# Altium PCB PCB robot V3.2.PCBDOC (part 3 of 3)
Units mil, origin at the board's own origin, x right, y up, seen from the top; angles counter-clockwise.
Board outline 11800 x 7870 mil, 2 copper layers (Top Layer, Bottom Layer); 128 components, 117 nets, 529 pads, 283 vias.
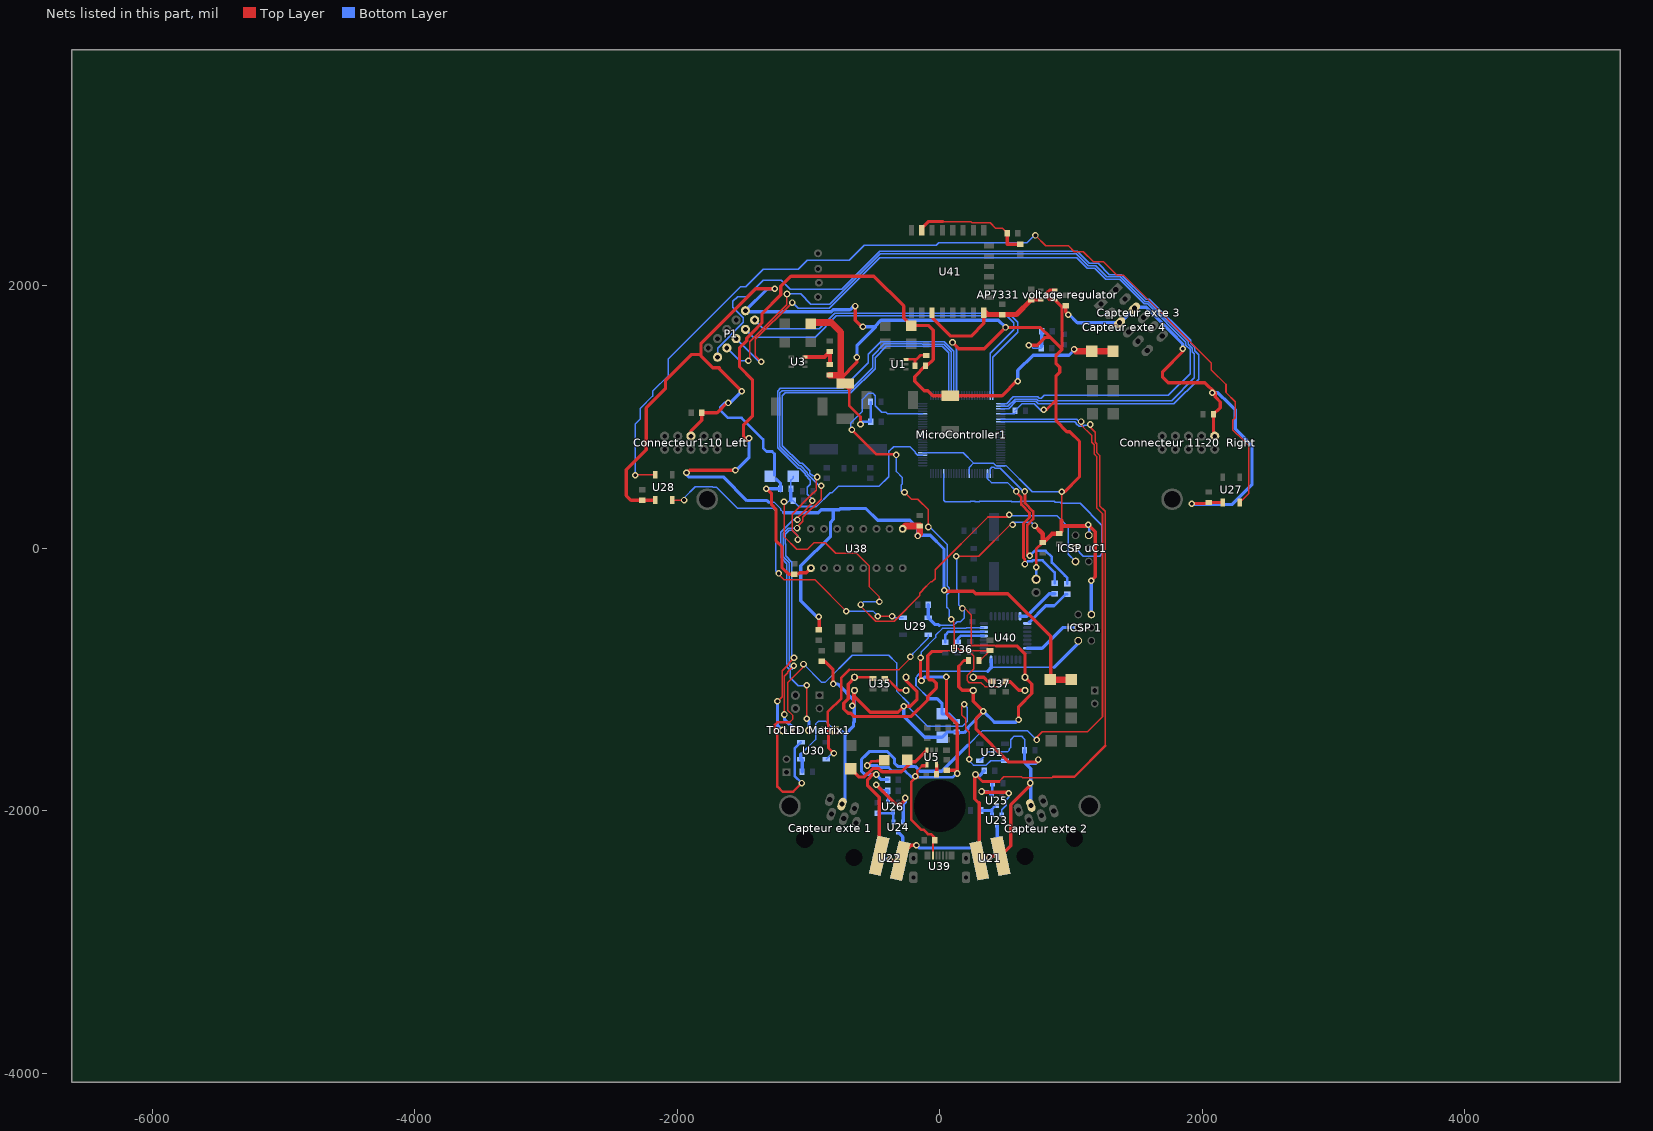
[diagram p3: the nets of this part, all layers, seen from the top]

## Via types
v1: diameter 50, hole 28, Top Layer to Bottom Layer, 283 vias

## Nets (pads, with @x,y where several pads share a name; then routed paths per layer and width w, separated by ;. In a path a pad name is that pad's centre, name@x,y a point inside that pad or via, vN(x,y) a via of type N, cw(c..) or ccw(c..) an arc to the next point about the centre after c; other vN are vias at no path point) (continued)
NetMicroController1_46: MicroController1.46 U36.1 | length 2921.3
  Top Layer w12: v1(-268.27,427.58) -214.19,373.5 -166.4,373.5 -85.94,293.05 v1(-85.94,162.64) ; v1(87.99,-541.71) 108.66,-562.38 108.66,-592.4 109.45,-593.19 U36.1@109.45,-740.55
  Top Layer w19.68: v1(-668.87,902.46) -482.54,716.12 v1@-352.7,716.12
  Bottom Layer w12: v1@-677.72,903.98 -677.72,955.61 -588.86,1044.47 -588.86,1134.72 -540.45,1183.13 -510.22,1183.13 -490.22,1163.13 -490.22,1086.34 -441.78,1037.91 -408.92,1037.91 -395.49,1024.48 MicroController1.46@-129.71,1024.48 ; v1(-329.9,711.67) -329.9,585.07 -286.82,541.98 -286.82,487.56 -291.99,482.39 -291.99,433.31 -286.26,427.58 v1(-268.27,427.58) ; v1@-80.14,166.12 58.85,27.13 58.85,-289.87 72.04,-303.06 72.04,-334.94 53.51,-353.47 53.51,-448.66 71.77,-466.92 v1@71.77,-525.49
NetMicroController1_58: "To LED Matrix1.5" MicroController1.58 | length 4906.3
  Top Layer w10: v1@-1238.01,-1165.47 v1(-1236.46,-1165.47) -1233.35,-1165.47 -1200.75,-1132.87 -1200.75,-932.81 -1150.83,-882.89 -1150.83,-875.39 v1(-1110.16,-834.72) ; -1200.75,-1384.09 -1196.69,-1388.15 ; v1(-1081.02,66.61) -1081.02,94.02 -1124.67,137.66 -1124.67,260.61 -985.79,399.49 -985.55,399.49 -941.99,443.05 -941.99,533.9 v1(-932.32,543.56)
  Bottom Layer w10: v1@-1126.83,-838.19 -1126.83,-104.63 -1174.17,-57.29 -1174.17,32.42 -1175.66,33.91 -1175.66,108.16 -1146.81,137.01 -1122.63,137.01 -1081.02,95.4 v1(-1081.02,66.61) ; v1@-933.29,531.97 -952.62,551.3 -968.29,551.3 -990.79,573.8 -990.79,590.55 -1047.12,646.88 -1063.87,646.88 -1199.61,782.62 -1199.61,1162.6 -1178.17,1184.04 -678.91,1184.04 -492.99,1369.95 -492.99,1452.72 -406.18,1539.53 20.2,1539.53 67.34,1492.38 69.1,1492.38 MicroController1.58@69.1,1164.24
  Bottom Layer w25: v1(-1236.46,-1165.47) -1236.46,-1348.39 -1196.69,-1388.15
NetMicroController1_59: "To LED Matrix1.4" MicroController1.59 | length 4858.7
  Top Layer w10: v1(-1183.15,-1266.67) -1183.15,-973.13 -1158.07,-948.05 -1158.07,-939.54 v1(-1113.27,-894.73) v1@-1113.27,-892.98 ; v1@-1113.31,-894.73 v1@-1113.31,-892.98 ; -1072.28,175.28 -1042.62,204.93 -1042.62,235.24 -903.41,374.45 v1(-903.41,477.54)
  Bottom Layer w10: -1120.89,-920.37 -1121.96,-920.37 -1143.92,-898.42 -1143.92,-876.35 -1147.64,-872.63 -1147.64,-108.55 -1191.65,-64.53 -1191.65,25.18 -1193.14,26.67 -1193.14,115.4 -1154.06,154.49 v1(-1087.11,154.49) v1@-1092.07,149.53 ; v1@-902.83,467.85 -909.73,467.85 -1008.39,566.51 -1008.39,577.11 -1060.56,629.29 -1071.16,629.29 -1217.2,775.33 -1217.2,1184.37 -1199.94,1201.63 -686.2,1201.63 -510.59,1377.24 -510.59,1468.96 -422.3,1557.24 -131.96,1557.24 -131.84,1557.13 29.25,1557.13 88.79,1497.58 MicroController1.59@88.79,1164.24
  Bottom Layer w25: v1(-1183.15,-1266.67) -1183.15,-1301.69 -1096.69,-1388.15
NetMicroController1_60: "To LED Matrix1.3" MicroController1.60 | length 4901.8
  Top Layer w10: v1(-1083.96,216.71) -1083.96,232.01 -1052.97,262.99 -1052.97,263.56 -969.67,346.87 -970.22,347.42 v1(-970.22,361.89) ; v1(-1014.19,-1043.03) -1014.19,-1283.8 v1@-1000.55,-1297.44
  Bottom Layer w10: v1(-1083.96,216.71) -1117.03,216.71 -1188.44,145.3 -1188.44,144.82 -1210.62,122.64 -1210.62,19.43 -1209.13,17.94 -1209.13,-71.77 -1165.12,-115.79 -1165.12,-879.87 -1161.4,-883.6 -1161.4,-905.66 -1138.37,-928.69 -1138.37,-984.72 -1077.03,-1046.06 v1@-1009.65,-1046.06 ; v1@-982.15,346.02 -972.2,355.96 -972.2,375.16 -1008.76,411.71 -1008.76,467.19 -987.24,488.7 -987.24,520.48 -1025.98,559.22 -1025.98,569.98 -1067.69,611.69 -1078.45,611.69 -1234.8,768.04 -1234.8,1198.61 -1214.19,1219.23 -737.32,1219.23 -543.9,1412.66 -543.9,1479.19 -448.37,1574.72 36.54,1574.72 108.47,1502.79 MicroController1.60@108.47,1164.24
  Bottom Layer w25: v1(-1014.19,-1299.72) -996.69,-1317.22 -996.69,-1388.15
NetMicroController1_74: MicroController1.74 P1.7 | length 2784.3
  Bottom Layer w10: P1.7@-1480.78,1668.82 -1422.45,1610.49 -950.12,1610.49 -789.94,1770.67 511.44,1770.67 562.56,1719.55 562.56,1665.12 384.06,1486.62 MicroController1.74@384.06,1164.24
NetMicroController1_75: MicroController1.75 P1.9 | length 2746.4
  Bottom Layer w10: P1.9@-1410.07,1739.54 -1345.69,1675.16 -918.62,1675.16 -801.22,1792.56 525.43,1792.56 594.13,1723.86 594.13,1646.16 403.75,1455.78 MicroController1.75@403.75,1164.24
NetMicroController1_76: MicroController1.76 P1.5 | length 6098.6
  Top Layer w10: v1(-1359.13,1422.7) -1404.96,1468.52 -1404.96,1592.06 -1124.41,1872.61 v1(-1124.41,1873.17)
  Bottom Layer w10: P1.5@-1551.49,1598.11 -1376.07,1422.7 v1(-1359.13,1422.7) ; v1(-1124.41,1873.17) -1121.69,1873.17 -1076.91,1828.39 -843.54,1828.39 -455.49,2216.44 1044.26,2216.44 1124.99,2135.71 1182.36,2135.71 1266.96,2051.1 1370.68,2051.1 1559.07,1862.72 1584.14,1862.72 1876.73,1570.13 1876.73,1548.3 1908.46,1516.57 1908.46,1330.39 1743.11,1165.04 795.3,1165.04 774.21,1143.95 758.71,1143.95 747.74,1154.92 560.91,1154.92 509.2,1103.22 MicroController1.76@464.77,1103.22
NetMicroController1_77: MicroController1.77 P1.3 | length 6242.6
  Top Layer w10: v1@-1457.66,1421.81 v1(-1457.66,1430) -1445.98,1441.67 -1445.98,1575.87 -1163.76,1858.09 v1(-1163.76,1938.29)
  Bottom Layer w10: P1.3@-1622.2,1527.4 -1524.8,1430 v1(-1457.66,1430) ; v1(-1163.76,1938.29) -1060.63,1938.29 -981.95,1859.61 -837.21,1859.61 -452.49,2244.33 1041.25,2244.33 1132.28,2153.31 1189.65,2153.31 1274.25,2068.7 1377.81,2068.7 1566.31,1880.2 1591.38,1880.2 1894.21,1577.37 1894.21,1555.54 1925.94,1523.81 1925.94,1498.14 1940.77,1483.32 1940.77,1298.66 1767.17,1125.06 752.88,1125.06 740.5,1137.44 574.04,1137.44 520.13,1083.53 MicroController1.77@464.77,1083.53
NetMicroController1_78: MicroController1.78 P1.1 | length 6493
  Bottom Layer w10: P1.1@-1669.8,1479.81 P1.1@-1692.91,1456.69 -1692.91,1526.4 -1495.41,1723.9 -1495.41,1757.56 -1575.87,1838.02 -1575.87,1881.5 -1539.74,1917.62 -1469.41,1917.62 -1344.51,2042.52 -1207.17,2042.52 -1139.72,1975.08 -746.63,1975.08 -458.04,2263.66 1046.81,2263.66 1139.57,2170.91 1207.72,2170.91 1292.32,2086.3 1384.93,2086.3 1573.55,1897.68 1598.63,1897.68 1911.69,1584.61 1911.69,1562.78 1943.43,1531.05 1943.43,1505.55 1972.48,1476.5 1972.48,1288.82 1784.84,1101.18 752.04,1101.18 733.26,1119.96 581.45,1119.96 525.34,1063.85 MicroController1.78@464.77,1063.85
NetMicroController1_82: MicroController1.82 R28.1 U22.gndReceiver | length 6187.3
  Top Layer w10: v1@721.83,-1455.81 726.2,-1460.18 v1(739.33,-1460.18) ; 1077.52,939.86 v1(1077.52,966.24)
  Top Layer w12: v1(739.33,-1460.18) 739.33,-1440.47 782.03,-1397.78 1125.94,-1397.78 1240.51,-1283.21 1240.51,263.66 1195.57,308.6 1195.57,700.51 1177.11,718.97 1177.11,789.53 1158.01,808.63 1158.01,859.37 1077.52,939.86
  Top Layer w25: v1@-480.86,-1722.68 -508.95,-1722.68 -549.49,-1763.22 -549.49,-1808.71 -461.31,-1896.89 U22.gndReceiver@-461.31,-2343.61
  Bottom Layer w10: MicroController1.82@464.77,985.11 1043.77,985.11 v1@1076.17,952.71 ; v1@720.96,-1460.18 v1(739.33,-1460.18)
  Bottom Layer w12: 215.33,-1500.59 327.09,-1388.84 667.99,-1388.84 v1(739.33,-1460.18)
  Bottom Layer w25: R28.1@-395.21,-1762.43 -444.77,-1762.43 v1(-483.59,-1723.6) -571.12,-1723.6 -595.98,-1698.74 -595.98,-1608.76 -564.67,-1577.44 -562.2,-1577.44 -535.85,-1551.09 -535.85,-1548.62 -535.71,-1548.48 -399.65,-1548.48 -344.33,-1603.8 -344.33,-1637.64 -319.57,-1662.4 -187.42,-1662.4 -150.27,-1699.55 16.38,-1699.55 215.33,-1500.59
NetMicroController1_83: MicroController1.83 R27.1 U21.gndReceiver | length 5037.8
  Top Layer w10: v1@1147.5,922.87 v1(1147.5,943.5)
  Top Layer w12: 452.77,-1776.89 488.74,-1740.93 575.23,-1740.93 575.61,-1741.31 623.76,-1741.31 632.37,-1749.92 673.7,-1749.92 673.89,-1749.73 705.83,-1749.73 706.03,-1749.92 856.22,-1749.92 865.22,-1740.93 ; v1@1147.5,922.87 1185.98,884.39 1185.98,808.32 1196.67,797.64 1196.67,729.56 1218.37,707.85 1218.37,324.9 1261.1,282.17 1261.1,-1506.1
  Top Layer w19.68: v1(272.83,-1723.58) 326.14,-1776.89 452.77,-1776.89 ; 865.22,-1740.93 1025.89,-1740.93 1260.71,-1506.1
  Top Layer w25: v1@268.23,-1728.19 268.23,-1909.68 268.98,-1910.43 268.98,-1910.59 295.79,-1937.4 ; U21.gndReceiver@301.81,-2379.39 301.81,-1937.86
  Bottom Layer w10: MicroController1.83@464.77,965.42 1028.01,965.42 1040.04,953.39 ; 1040.04,950.72 1061.99,928.76 1093.04,928.76 1101.54,937.26 1102.3,936.5 v1@1123.9,936.5
  Bottom Layer w25: v1@284.7,-1735.45 300.67,-1735.45 R27.1@340.47,-1695.65
NetR1_1: R1.1 R3.2 U1.3 | length 310.3
  Top Layer w20: U1.3@-257.81,1440.33 -178.29,1440.33 -148.27,1470.35 -102.64,1470.35 R3.2@-102.52,1470.24 -147.91,1470.24 -188.31,1429.84 R1.1@-188.31,1389.8
NetR5_1: R5.1 R6.2 U3.3 | length 302.7
  Top Layer w31.5: U3.3@-1025.33,1458.05 -876.83,1458.05 -836.95,1497.93 R5.1@-836.95,1400.18
NetR9_1: R9.1 U5.5 | length 71.9
  Top Layer w25: R9.1@-23.2,-1720.09 U5.5@-23.2,-1648.15
NetR29_2: R29.2 U23.1 U25.3 | length 153
  Bottom Layer w19.68: U23.1@398.59,-2031.48 398.59,-1988.49 418.13,-1968.96
  Bottom Layer w25: R29.2@314.88,-1998.01 397.25,-1998.01
NetR30_2: R30.2 U24.1 U26.3 | length 197.6
  Bottom Layer w19.68: R30.2@-472.09,-2019.98 -366.27,-2019.98 U26.3@-356.12,-2009.82 -353.43,-2012.51 U24.1@-353.43,-2086.13
NetR31_2: R31.2 U23.2 U25.1 | length 560.1
  Top Layer w25: v1@325.72,-1859.94 v1@526.87,-1859.94
  Bottom Layer w12: U23.2@473.4,-2031.48 473.4,-1991.76 506.5,-1958.66 506.5,-1916.93 526.87,-1896.56 v1(526.87,-1865.39)
  Bottom Layer w19.68: U25.1@401.76,-1870.23 R31.2@401.76,-1790.7
  Bottom Layer w25: v1(319.14,-1853.36) 368.87,-1853.36 U25.1@398.2,-1882.69
NetR32_2: R32.2 U24.2 U26.1 | length 693.5
  Top Layer w25: v1(-483.98,-1801.77) -337.54,-1948.21 -293.62,-1948.21 -261.78,-1916.37 v1(-261.78,-1902.91)
  Bottom Layer w19.68: v1@-478.49,-1805.44 v1@-471.17,-1805.44 ; U26.1@-393.52,-1931.08 R32.2@-393.52,-1851.44
  Bottom Layer w25: v1(-483.98,-1801.77) -437.3,-1848.45 R32.2@-396.52,-1848.45 ; U24.2@-278.63,-2086.13 -278.63,-1951.52 -261.78,-1934.67 v1(-261.78,-1902.91)
NetR33_2: R33.2 U35.4 U36.3 | length 1760.9
  Top Layer w12: 11.06,-786.77 17.91,-779.92 U36.3@109.45,-779.92
  Top Layer w20: U35.4@-649.61,-982.68 -518.43,-982.68 R33.2@-508.07,-993.03
  Top Layer w25: U35.4@-649.61,-982.68 -649.61,-987.44 -697.22,-1035.06 -697.22,-1145.93 -730.59,-1179.29 -730.59,-1224.61 -697.46,-1257.74 -677.5,-1257.74 -654.09,-1281.14 -217.01,-1281.14 -91.91,-1156.04 -91.91,-1131.26 -25.59,-1064.94 -25.59,-1027.62 -51.99,-1001.22 -78.86,-1001.22 -91.91,-988.17 -91.91,-818.35 -60.33,-786.77 11.06,-786.77
NetR34_2: R34.2 U35.2 | length 199.1
  Top Layer w20: R34.2@-417.66,-992.46 -412.62,-997.5 -397.05,-997.5 -311.87,-1082.68 U35.2@-255.91,-1082.68
NetR35_2: R35.2 U37.2 | length 161.7
  Top Layer w25: U37.2@255.91,-982.68 335.43,-982.68 365.87,-1013.11 R35.2@404.96,-1013.11
NetR36_2: R36.2 U36.5 U37.4 | length 756.6
  Top Layer w12: U36.5@223.62,-799.61 223.75,-799.48 238.63,-799.48 259,-819.84 259,-919.96 209.49,-969.47 209.49,-1007.07 226.22,-1023.8 314.76,-1023.8 344.55,-1053.58 462.81,-1053.58 R36.2@503.29,-1013.11
  Top Layer w25: R36.2@503.29,-1013.11 506.56,-1016.38 536.81,-1016.38 603.11,-1082.68 U37.4@649.61,-1082.68
NetR41_1: R41.1 U40.30 | length 358.9
  Bottom Layer w20: R41.1@43.3,-714.94 43.3,-659.67 67.35,-635.62 U40.30@336.92,-635.62
NetR42_1: R42.1 U40.8 | length 334.6
  Bottom Layer w25: U40.8@612.51,-517.51 663.6,-517.51 834.73,-346.37 R42.1@876.2,-346.37
NetR43_1: R43.1 U40.9 | length 377.9
  Bottom Layer w20: 870.08,-438.19 957.87,-350.4 R43.1@970.83,-350.4
  Bottom Layer w25: 680.39,-561.53 685.59,-561.53 808.93,-438.19 870.08,-438.19
NetR44_2: R44.2 U40.29 | length 233.4
  Bottom Layer w20: R44.2@138.88,-715.02 138.88,-688.59 160.36,-667.11 U40.29@336.92,-667.11
NetR51_2: R51.2 R52.1 U41.21 | length 903.7
  Top Layer w12: 25.28,2490.16 239.11,2490.16 248.96,2480.31 384.86,2480.31 425.45,2439.72 477.8,2439.72 R51.2@515.24,2402.29
  Top Layer w25: U41.21@-137.13,2430.73 -137.13,2439.41 -86.38,2490.16 25.28,2490.16 ; R51.2@515.24,2402.29 515.24,2317.55 514.62,2316.93 R52.1@614.21,2316.93
NetU21_gndEmitter: U21.gndEmitter U23.3 | length 227.6
  Bottom Layer w25: U21.gndEmitter@438.04,-2343.24 U23.3@438.04,-2115.65
NetU22_gndEmitter: U22.gndEmitter U24.3 | length 238
  Bottom Layer w25: U24.3@-316.03,-2164.87 -281.42,-2199.49 -281.42,-2362.03 U22.gndEmitter@-300.19,-2380.8
NetU27_dout: U27.dout U28.din | length 7278.4
  Top Layer w12: v1@-2317.26,563.58 -2314.31,560.63 U28.din@-2168.31,560.63 ; v1(729.53,2384.63) 807.7,2306.46 980.79,2306.46 1026.26,2260.98 1094.73,2260.98 1172.32,2183.39 1248.79,2183.39 1349.95,2082.22 1400.39,2082.22 2069.76,1412.85 2069.76,1408.74 2070.47,1408.03 2070.47,1359.92 2181.91,1248.48 2181.91,1188.33 2252.21,1118.03 2252.21,1003.22 2250.89,1001.9 2250.89,993.26 2233.41,975.77 2233.41,901.54 2268.19,866.75 2271.16,866.75 2353.88,784.03 2353.88,415.49 U27.dout@2287.4,349.02
  Bottom Layer w12: v1(-2319.88,557.07) -2319.88,947.83 -2282.11,985.61 -2282.11,1066.38 -2188.31,1160.18 -2188.31,1196.65 -2067.17,1317.8 -2067.17,1444.05 -1517.38,1993.84 -1478.39,1993.84 -1345.53,2126.69 -1078.5,2126.69 -1009.45,2195.75 -689.62,2195.75 -575,2310.37 -25.99,2310.37 -7.76,2328.6 665.69,2328.6 v1@713.9,2376.81
NetU28_dout: U28.dout U29.din | length 2503.4
  Top Layer w12: U28.dout@-2038.39,367.72 v1(-1948.17,367.72) ; v1(-1227.32,-191.42) -1227.32,-198.64 -1187.82,-238.15 -952.93,-238.15 v1@-705.59,-485.49 ; v1@-475.16,-511.28 -468.92,-517.52 v1(-363.05,-517.52)
  Bottom Layer w12: v1(-1948.17,367.72) -1948.17,384.29 -1862.29,470.17 -1731.82,470.17 -1727.18,465.53 -1701.14,465.53 -1540.18,304.57 -1269.41,304.57 -1248.75,283.91 -1248.75,275.32 -1248.58,275.15 -1248.58,-170.16 v1(-1227.32,-191.42) ; v1(-711.81,-478.37) -508.98,-478.37 v1@-475.61,-511.73 ; v1(-363.05,-517.52) -352.17,-528.41 U29.din@-279.8,-528.41
  other v1: -471.59,-517.52
NetU29_dout: U29.dout U30.din | length 1535.6
  Top Layer w12: -848.35,-1429.57 -847.56,-1430.35 ; -688.48,-924.41 -310.06,-924.41 v1@-213.98,-828.33
  Top Layer w19.68: -851.99,-1337.13 -851.99,-1245.24 -749.76,-1143.01 -749.76,-985.69 -688.48,-924.41 ; -848.35,-1429.57 -848.35,-1340.77 ; -847.56,-1430.35 -847.56,-1520.49 v1(-805.85,-1562.2)
  Bottom Layer w12: U30.din@-865.02,-1606.89 -820.33,-1562.2 v1(-805.85,-1562.2) ; v1(-222.99,-826.04) -203.76,-806.81 -203.76,-801.1 -86.89,-684.23 U29.dout@-86.89,-658.33
NetU30_dout: U30.dout U31.din | length 4365.6
  Top Layer w12: -1145.79,-1327.03 -1118.76,-1300 -1118.76,-1273.88 -1159,-1233.64 -1159,-1023.84 -1097.24,-962.09 -1097.24,-961.87 v1@-1028.33,-892.95 ; v1(186.06,-1188.6) 166.83,-1207.83 166.83,-1267.46 197.83,-1298.46 197.83,-1375.53 224.65,-1402.34 v1(224.65,-1606.34)
  Top Layer w19.68: -1145.79,-1327.03 -1238.05,-1327.03 -1257.15,-1346.12 -1257.15,-1401.79 -1236.97,-1421.97 -1236.97,-1815.3 -1197.13,-1855.14 -1117.36,-1855.14 v1(-1051.4,-1789.17)
  Bottom Layer w12: v1(-1038.11,-881.91) -898.2,-1021.82 -873.28,-1021.82 -666.83,-815.37 -387.31,-815.37 -328.5,-874.18 -328.5,-1087.53 -236.13,-1179.91 -236.13,-1212.52 -91.56,-1357.09 171.99,-1357.09 209.82,-1319.25 209.82,-1212.36 v1(186.06,-1188.6) ; v1@222.13,-1616.81 257.3,-1651.99 355.33,-1651.99 388.76,-1618.56 U31.din@497.46,-1618.56
  Bottom Layer w19.68: U30.dout@-1057.93,-1476.97 -1105.04,-1524.07 -1105.04,-1735.53 v1(-1051.4,-1789.17)
RESET: "ICSP uC1.5" C25.1 D12.1 MicroController1.30 R47.1 | length 5481.4
  Top Layer w12: v1@-1196.82,366.34 v1@-1194.07,366.34 ; v1@-1196.82,366.34 v1@-1186.61,366.34 ; v1@-1183.44,349.27 -1183.09,348.92 -1183.09,86.49 -1089.96,-6.64 -1007.21,-6.64 -957.89,42.68 -872.19,42.68 -791.59,-37.92 -633.75,-37.92 -538.33,-133.34 -538.33,-291.18 -459.15,-370.35 v1(-459.15,-408.09) ; v1@-600.61,-441 -600.61,-443.03 -487.57,-556.08 -347.08,-556.08 -151.35,-360.35 -151.35,-341.67 -128.76,-319.08 -128.76,-316.47 -65.95,-253.66 -57.2,-253.66 -34.61,-231.07 -34.61,-163.37 367.48,238.72 525.75,238.72 530.85,243.82 v1(530.85,255.53)
  Bottom Layer w12: v1@-1186.61,366.34 v1(-1186.61,356) -1171.43,340.83 -1168.56,340.83 -1145.24,364.15 -1134.15,364.15 C25.1@-1115.59,364.15 ; R47.1@-1134.15,452.67 -1134.15,518.94 -1116.54,536.56 D12.1@-1116.54,549.04 ; C25.1@-1112.52,357.09 -1074.04,318.61 -939.36,318.61 -833.92,424.05 -820.68,424.05 -772.06,472.68 -462.48,472.68 -389,546.16 -389,742.73 -382.44,742.73 -350.73,774.44 -226.89,774.44 -186.93,734.49 ; v1(-600.61,-428.54) -580.16,-408.09 v1(-459.15,-408.09) ; -186.93,728.84 -167.61,709.52 MicroController1.30@-129.71,709.52 ; v1@522.18,246.73 895.85,246.73 979.49,163.09 979.49,-44.61 1035.71,-100.83
  Bottom Layer w25: C25.1@-1134.15,364.15 R47.1@-1134.15,452.67
"RESET 16": "ICSP 1.5" D13.1 R48.1 U40.24 | length 1957.9
  Bottom Layer w12: -79.89,-1145.89 -180.33,-1045.44 -180.33,-985.05 -171.22,-975.94 -171.22,-971.46 -136.69,-936.93 71.04,-936.93 365.43,-936.93 ; 394.53,-907.83 871.87,-907.83
  Bottom Layer w25: -79.89,-1145.89 -19.84,-1145.89 18.15,-1183.88 D13.1@18.15,-1262.04 70.24,-1262.04 R48.1@128.67,-1320.46 ; 365.43,-936.93 394.53,-907.83 ; 392.04,-910.32 U40.24@392.04,-848.21 ; 871.87,-907.83 1055.96,-723.74 1055.96,-704.18
SCK: "ICSP uC1.3" MicroController1.20 | length 1950.7
  Bottom Layer w10: MicroController1.20@29.73,569.75 30.92,568.57 30.92,367.12 41.81,356.22 232.06,356.22 235.15,359.31 268.79,359.31 271.88,356.22 302.93,356.22 306.02,359.31 359.06,359.31 360.13,358.24 421.8,358.24 422.87,359.31 442.36,359.31 442.69,358.98 504.36,358.98 504.68,359.31 543.6,359.31 547.46,355.45 572.24,355.45 572.94,354.75 609.83,354.75 614.39,359.31 616.54,359.31 616.76,359.08 678.43,359.08 678.66,359.31 873.5,359.31 881.23,351.57 918.5,351.57 927.36,342.72 1070.22,342.72 1236.95,175.98 1236.95,54.89 1240.39,51.45 1240.39,-37.17 1218.85,-58.7 1093.58,-58.7 1035.71,-0.83
"SCK 16": "ICSP 1.3" U40.15 | length 453.5
  Bottom Layer w25: U40.15@667.63,-761.6 780.05,-761.6 937.48,-604.18 1055.96,-604.18
SELIAL_RX: MicroController1.2 R43.2 | length 1356.1
  Top Layer w20: v1@643.56,433.44 649.8,427.21 649.8,344.62 712.34,282.08 712.34,223.12 667.52,178.3 v1@667.52,-53.54
  Bottom Layer w10: MicroController1.2@385.25,568.57 MicroController1.2@384.06,569.75 385.25,570.94 385.25,606.95 396.09,617.79 414.04,617.79 419.64,612.18 462.01,612.18 626.52,447.68 v1@626.52,438.05
  Bottom Layer w20: v1(685.83,-55.91) 723.03,-18.7 807.09,-18.7 854.81,-66.42 854.81,-108.27 953.56,-207.02 954.66,-207.02 970.83,-223.19 R43.2@970.83,-270.4
  other v1: 647.6,433.52
SERIAL_TX: MicroController1.3 R42.2 | length 1249.5
  Top Layer w20: v1@579.86,429.17 622.24,386.8 622.24,333.21 684.78,270.67 684.78,234.53 638.98,188.73 638.98,-73.5 648.59,-83.12 648.59,-90.85 652.74,-95
  Bottom Layer w12: MicroController1.3@364.38,569.75 364.56,569.57 364.56,531.13 394.41,501.28 516.32,501.28 579,438.6 v1@579,431.67
  Bottom Layer w20: v1(649.63,-120.12) 671.36,-98.39 703.42,-98.39 709.68,-92.13 784.65,-92.13 876.2,-183.68 R42.2@876.2,-266.37
  other v1: 583.5,433.7
"USB PIN": C8.1 D?.1 U5.3 | length 719.4
  Top Layer w25: D?.1@-679.41,-1680.16 -617.11,-1742.46 -574.78,-1742.46 -510.86,-1678.54 -464.93,-1678.54 -441.98,-1701.49 -437.87,-1697.38 -437.87,-1702.83 -436.99,-1703.72 -291.06,-1703.72 -214.14,-1626.8 -186.9,-1626.8 U5.3@-98,-1537.91
"VCC 3.3V": "AP7331 voltage regulator.5" C6.2 C29.1 U41.3 U41.8 | length 1100.5
  Top Layer w25: U41.3@-57.54,1794.49 -51.32,1788.27 -51.32,1753.25 83.94,1617.99 239.82,1617.99 336.16,1714.33 U41.8@336.16,1794.49 ; C6.2@698.31,1893.76 773.01,1893.76
  Top Layer w39.37: U41.8@337.61,1807.67 364.22,1781.06 C29.1@476.68,1781.06 585.61,1781.06 C6.2@698.31,1893.76
"VCC 5V": "AP7331 voltage regulator.1" "AP7331 voltage regulator.3" "Capteur exte 1.3" "Capteur exte 2.3" "Capteur exte 3.3" "Capteur exte 4.3" "Connecteur1-10 Left.6" "Connecteur 11-20  Right.2" "ICSP 1.2" "ICSP uC1.2" "To LED Matrix1.1" C4.1 C5.1 C9.1 C10.1 C11.1 C12.1 C13.1 C17.2 C20.1 C26.1 C30.1 C31.1 D2.1 D12.2 D13.2 LD2.A MicroController1.10 MicroController1.31 MicroController1.61 MicroController1.80 MicroController1.100 P1.10 pullUpSCL.1 pullUpSDA.1 R5.2 R5V.2 R37.2 R45.2 R46.2 R47.2 R48.2 SW2.2 U21.VCC U22.VCC U27.VCC U28.VCC U29.VCC U30.VCC U31.VCC U35.1 U35.3 U36.8 U37.1 U37.3 U38.9 | length 32073.4
  Top Layer w12: v1(127.11,-60.51) 297.2,-60.51 v1@539.06,181.34 ; v1@181.42,-447.85 241.32,-507.76 241.32,-740.55 419.39,-740.55 422.95,-744.11 ; R46.2@909.56,110.73 R46.2@912.22,113.39 R46.2@929.21,130.38 ; 929.21,211.57 v1(929.21,431.14) ; v1@1125.14,171.34 v1(1133.27,179.47)
  Top Layer w20: D2.1@-688.13,1228.13 -688.13,1086.11 -603.74,1001.72 v1(-603.74,945.37) ; 145.45,-896.48 186.87,-855.06 R37.2@219.45,-855.06 ; v1(735.04,-144.88) 735.04,-6.93 R45.2@785.45,43.48 ; v1(792.32,1056.91) 813.78,1056.91 886.89,1130.02
  Top Layer w25: U28.VCC@-2169.09,366.93 C11.1@-2266.54,366.93 -2353.15,366.93 -2388.25,402.03 -2388.25,598.01 -2235.67,750.59 -2235.67,1069.65 -2090.43,1214.88 -2090.43,1276.36 -1889.37,1477.42 -1818.68,1477.42 ; -1896.06,855.12 -1896.06,891.59 -1812.59,975.07 C31.1@-1812.59,1033.48 -1697.05,1033.48 v1@-1617.19,1113.35 ; v1(-1508.66,1196.06) -1677.54,1364.94 -1677.54,1375.59 -1730.33,1375.59 -1818.68,1463.94 -1818.68,1477.42 ; v1@-1323.64,459.19 -1281.13,416.68 -1281.13,331.47 -1248.27,298.61 -1248.27,59.49 -1201.87,13.09 -1201.87,-147.28 -1151.54,-197.62 C17.2@-1108.27,-197.62 ; v1(-1256.42,1978.62) -1400.18,1978.62 -1401.53,1979.97 -1818.68,1562.81 -1818.68,1477.42 ; -1076.83,-195.69 -1068.17,-187.03 -1017.54,-187.03 U38.9@-981.89,-151.38 ; R5V.2@-900.35,-859.74 -877.26,-859.74 -812.85,-924.15 v1@-812.85,-1033.64 ; D2.1@-754.07,1294.07 -630.75,1417.4 v1(-630.75,1456.18) ; v1@-659.58,-1207.63 -661.32,-1209.37 -661.32,-1208.43 -655.32,-1202.42 -655.32,-1110.55 ; U35.3@-649.61,-1082.68 -649.61,-1127.78 -528.8,-1248.58 -317.74,-1248.58 v1@-274.61,-1205.45 ; v1(-642.62,1846.4) -642.62,1737.58 v1@-590.67,1685.63 ; v1@-381.57,-2366.12 -366.89,-2380.8 U22.VCC@-300.19,-2380.8 -300.19,-2347.43 -216.54,-2263.78 v1(-177.17,-2263.78) ; v1(-274.61,-1202.93) -222.8,-1202.93 -173.31,-1153.44 -173.31,-1091.28 -175.83,-1088.76 -176.11,-1088.76 -255.91,-1008.96 U35.1@-255.91,-982.68 ; v1(97.5,1569.02) 144.51,1522.01 340.49,1522.01 v1(501.77,1683.29) ; 145.45,-896.48 145.45,-1056.67 171.46,-1082.68 U37.1@255.91,-1082.68 255.91,-1165.06 v1(331.97,-1241.12) 276.93,-1296.16 276.93,-1379.29 526.69,-1629.06 744.59,-1629.06 751.54,-1622.11 v1(751.54,-1609.68) ; v1(378.02,-2356.14) 389.14,-2345.02 U21.VCC@463.55,-2345.02 540.59,-2267.97 540.59,-1955.71 v1@687.17,-1809.13 ; 430.93,-744.76 592.28,-744.76 649.61,-802.09 U37.3@649.61,-982.68 700.98,-1034.06 700.98,-1106.3 600.91,-1206.38 v1(600.91,-1306.46) ; v1@513.6,1683.01 765.93,1683.01 841.96,1606.98 ; v1(678.5,1548.33) 744.78,1548.33 803.43,1606.98 841.96,1606.98 ; 876,1968.37 838.07,1968.37 820.61,1950.91 820.61,1913.37 840.41,1893.56 876,1893.56 932.4,1837.17 932.4,1516.54 ; v1(929.21,431.14) 951.32,431.14 1065.63,545.45 1065.63,814.72 992.5,887.85 969.76,887.85 886.89,970.73 886.89,1130.02 886.89,1314.94 914.33,1342.38 914.33,1379.71 886.89,1407.15 886.89,1471.02 932.4,1516.54 ; C5.1@960.59,1847.97 960.59,1800.85 v1(980.93,1780.51) ; v1(1133.27,179.47) 1185.77,126.97 1185.77,-216.37 v1(1155.53,-246.62) ; v1@1854.31,1511.34 1854.31,1502.4 1698.52,1346.61 1698.52,1304.45 1740.65,1262.32 2021.54,1262.32 2099.17,1184.69 2099.17,1154.06 2138.03,1115.2 2138.03,1072.38 C30.1@2086.08,1020.43 2086.08,865.1 ; v1(1920.53,340.83) 2042.6,340.83 C12.1@2050.39,348.62 2157.09,348.62 U27.VCC@2157.48,349.02 ; 841.96,1606.98 932.4,1516.54
  Top Layer w31.5: v1(723.07,173.66) 785.45,111.28 R45.2@785.45,43.48 785.45,39.51 856.67,110.73 R46.2@909.56,110.73 ; R46.2@929.21,130.38 929.21,211.57 ; 931.52,171.34 v1@1125.14,171.34
  Top Layer w50: C4.1@-980.06,1720.85 -827.11,1720.85 -754.07,1647.81 D2.1@-754.07,1294.07 ; R5.2@-836.95,1320.18 -780.18,1320.18 D2.1@-754.07,1294.07 ; D2.1@-688.13,1228.13 D2.1@-754.07,1294.07
  Bottom Layer w12: -1057.93,-1569.51 -946.08,-1457.66 -946.08,-1339.61 -925.61,-1319.13 -865.71,-1319.13 -796.69,-1388.15 ; pullUpSCL.1@-526.24,966.57 -526.24,1043.64 ; MicroController1.31@-129.71,729.2 178.79,729.2 258.03,649.96 ; -3.65,-587.38 105.93,-587.38 133.39,-559.93 158.32,-559.93 188.13,-530.12 188.13,-474.82 144.23,-430.93 144.23,-330.91 129.92,-316.59 v1@129.92,-75.06 ; v1(97.5,1569.02) 128.16,1538.36 MicroController1.61@128.16,1164.24 ; MicroController1.10@226.58,569.75 226.58,618.51 258.03,649.96 ; U31.VCC@304.55,-1618.56 371.34,-1551.77 517.24,-1551.77 528.78,-1540.23 528.78,-1530.03 540.94,-1517.86 540.94,-1458.54 566.85,-1432.64 624.7,-1432.64 646.95,-1454.88 C9.1@646.95,-1539.17 ; MicroController1.80@464.77,1024.48 569.81,1024.48 C26.1@577.88,1032.56 ; v1(555.37,180.89) 555.37,194.94 552.13,198.19 698.54,198.19 v1(723.07,173.66) ; C26.1@573.22,1048.08 626.44,1101.3 720.87,1101.3 v1@777.32,1044.84 ; v1@676.06,1560.47 710.35,1526.18 LD2.A@774.72,1526.18 ; v1(929.21,431.14) 705.62,431.14 505.99,630.78 MicroController1.100@464.77,630.78 464.69,630.86 427.26,630.86 408.17,649.96 258.03,649.96 ; 1133.27,101.61 1138.76,107.1
  Bottom Layer w20: v1(-1611.85,1108.01) -1639.82,1108.01 -1673.27,1074.57 -1673.27,1053.92 -1613.6,994.25 -1509.92,994.25 -1344.9,829.23 -1344.9,762.84 -1320.02,737.95 -1277.13,737.95 -1259.06,719.88 D12.2@-1259.06,555.58 ; v1(-603.74,945.37) -583.52,965.59 pullUpSCL.1@-525.26,965.59 pullUpSDA.1@-525.26,1113.94 ; SW2.2@735.04,-236.02 v1(735.04,-144.88) ; 1138.76,107.1 v1@1138.76,175.81
  Bottom Layer w25: v1(-1611.85,1108.01) -1597.68,1108.01 v1@-1503.83,1201.86 ; v1(-1322.09,454.53) R47.2@-1215.71,454.53 ; v1(-1256.42,1978.62) -1312.41,1978.62 P1.10@-1480.78,1810.25 -1473.82,1803.29 -825.82,1803.29 -811.57,1817.54 -683.23,1817.54 v1@-653.41,1847.36 ; -1246.3,527.71 -1212.6,494.01 R47.2@-1212.6,437.87 ; U30.VCC@-1057.93,-1606.89 -1057.93,-1569.51 ; C10.1@-1048.52,-1703.03 U30.VCC@-1048.52,-1612.28 ; v1(-811.52,-1033.64) -778.25,-1033.64 -651.18,-1160.71 -651.18,-1321.43 -657.24,-1327.49 -657.24,-1356.4 -721.34,-1420.49 ; -796.69,-1388.15 -752.42,-1388.15 -721.34,-1419.23 -721.34,-1420.49 ; -744.2,-1949.27 -721.34,-1926.4 -721.34,-1420.49 ; v1(-630.75,1456.18) -630.75,1542.99 -490.45,1683.29 ; v1(-584.78,1689.55) -496.71,1689.55 -447.81,1738.44 446.61,1738.44 v1(501.77,1683.29) ; U22.VCC@-461.31,-2343.61 -435.47,-2369.44 v1(-380.74,-2369.44) ; v1(-274.61,-1202.93) -274.61,-1278.37 -113.77,-1439.2 D13.2@18.15,-1439.2 56.89,-1400.46 R48.2@128.67,-1400.46 132.28,-1404.07 186,-1404.07 213.71,-1376.37 213.71,-1365.58 v1@335.93,-1243.37 ; v1(-177.17,-2263.78) -157.48,-2283.46 301.81,-2283.46 U21.VCC@301.81,-2379.39 356.43,-2379.39 v1@373.87,-2361.96 ; U29.VCC@-86.89,-528.41 -34.27,-581.02 -10.01,-581.02 -3.65,-587.38 ; U29.VCC@-86.5,-528.01 C13.1@-86.5,-430.18 ; v1(331.97,-1241.12) 335.07,-1244.22 414.57,-1323.72 416.59,-1325.75 581.61,-1325.75 v1(600.91,-1306.46) ; C9.1@646.95,-1539.17 646.95,-1631.48 646.66,-1631.76 652.71,-1637.81 ; 694.81,-1959.88 694.81,-1679.91 652.71,-1637.81 ; v1@751.57,-1619.43 733.2,-1637.81 652.71,-1637.81 ; LD2.A@777.99,1538.78 C20.1@777.99,1655.63 ; v1@985.53,1783.98 1049.57,1719.94 1370.22,1719.94 ; 1155.96,-504.18 v1@1155.96,-263.14 ; 1375.29,1719.94 1482.58,1827.23 ; 1483.5,1829.51 1491.73,1837.74 1573.8,1837.74 1759.53,1652 1759.53,1649.52 1851.75,1557.3 v1(1851.75,1520.28) ; v1@1932.72,338.01 1936.48,334.25 2229.88,334.25 2379.98,484.35 2379.98,783.96 2252.68,911.26 2252.68,1056.69 2207.3,1102.07 2205.49,1102.07 2120.85,1186.71 v1(2077.99,1186.71)
  other v1: 689.86,-1788.29 -666.12,-1199.33 173.27,-458.01
"VCC 5V USB": C7.1 C19.2 LD1.A U5.4 U39.1 U40.31 | length 3616.7
  Top Layer w12: v1@-173.28,-1740.28 v1@-171.02,-1738.02 ; -171.02,-1696.42 -132.44,-1657.85
  Top Layer w15.75: U39.1@-51.18,-2341.73 -51.18,-2295.79 ; -51.06,-2287.52 -51.06,-2236.1 C19.2@-39.37,-2224.41
  Top Layer w20: v1(-551,-1654.96) -519.35,-1623.31 -477.7,-1623.31 ; -477.7,-1620.49 C7.1@-408.82,-1620.49 ; v1(-185.3,-1737.78) -175.82,-1737.78 -169.52,-1744.08 -179.79,-1744.08 -216.87,-1781.16 -216.87,-2066.59 -137.8,-2145.67 -121.33,-2145.67 -88.81,-2178.19 -65.91,-2178.19 -39.37,-2204.72 C19.2@-39.37,-2224.41 ; v1@-171.02,-1738.02 -171.02,-1696.42
  Top Layer w25: v1(-145.63,-834.57) -145.63,-1002.74 v1(-138.82,-1009.55) ; -132.44,-1657.85 -107.71,-1657.85 U5.4@-98,-1648.15 ; v1(50.2,-980.31) v1@64.53,-980.31 ; LD1.A@54.13,-1691.75 120.04,-1691.75 ; v1@64.43,-980.22 51.38,-993.27 51.38,-1257.72 131.24,-1337.58 131.24,-1397.41 133.8,-1399.96 v1(133.8,-1716.1)
  Bottom Layer w12: v1@-141.44,-840.87 -141.44,-790.08 -31.22,-679.86 -31.22,-663.19 21.63,-610.33 199.84,-610.33 206.06,-604.12 U40.31@336.92,-604.12
  Bottom Layer w20: v1(-551,-1654.96) -476.23,-1654.96 -460.5,-1670.69 -388.58,-1670.69 -363.6,-1695.67 -262.54,-1695.67 -214.12,-1744.08 99.74,-1744.08 v1@130.76,-1713.06
  Bottom Layer w25: v1(-138.82,-1009.55) -109.19,-979.92 v1@42.42,-979.92 ; v1(50.2,-980.31) v1@64.53,-980.31
"VCC 8V": C2.1 C18.1 D1.1 D4.2 D5.2 D10.2 D11.2 R1.2 R8V.2 U38.8 | length 10994.2
  Top Layer w25: v1@-1927.95,570.51 -1904.49,593.98 v1(-1556.75,593.98) ; v1@-1466,823.62 -1495.49,853.11 -1495.49,939.19 -1427.34,1007.34 -1427.34,1286.32 -1525.67,1384.65 -1525.67,1527.6 -1471.04,1582.22 -1471.04,1600.7 -1425.72,1646.02 -1354.23,1717.51 -1354.23,1788.43 -1211.36,1931.3 -1211.36,1996.52 -1134,2073.88 -501.57,2073.88 -274.72,1847.03 -274.72,1756.65 C2.1@-215.69,1697.62 -82.17,1697.62 -48.15,1663.6 -48.15,1438.6 -96.95,1389.8 R1.2@-108.31,1389.8 -190.71,1307.4 -190.71,1273.78 -117.17,1200.24 -91.2,1200.24 -53.35,1162.38 D1.1@79,1162.38 475.04,1162.38 v1@592.07,1279.41 ; -917.05,-600.24 v1@-917.05,-523.21 ; v1(33.56,-319) 42.5,-327.93 62.73,-327.93 62.94,-327.72 255.02,-327.72 273.03,-345.73 520.42,-345.73 846,-671.31 846,-998.29 D11.2@844.09,-1000.2
  Top Layer w50: U38.8@-281.89,148.62 -260.43,170.08 C18.1@-150.79,170.08 -150.79,111.38 v1(-167.58,94.59) ; D11.2@844.09,-1000.2 D5.2@1001.57,-1000.2 ; v1(1024.09,1517.3) 1038.25,1503.15 D4.2@1160.24,1503.15 ; D4.2@1160.83,1502.56 D10.2@1320.67,1502.56
  Bottom Layer w12: -1301.61,350.03 -1259.77,350.03 -1209.79,300.04 -1209.79,291.46 -1188.49,270.16
  Bottom Layer w25: v1(-1929.7,575.73) -1921.61,567.64 -1921.61,551.24 -1914.29,543.92 -1648.66,543.92 -1468.74,364 -1315.58,364 -1301.61,350.03 ; v1@-1548.94,596.59 -1453.09,692.44 v1(-1453.09,839.15) ; -1188.49,270.16 -926.35,270.16 -902.1,294.41 -811.59,294.41 ; v1@-928.51,-529.46 -1058.44,-399.53 -1058.44,-133.78 -831.87,92.8 -831.87,199.67 -811.59,219.94 -811.59,294.41 ; v1(-167.58,94.59) -167.58,152.52 -228.03,212.97 -471.36,212.97 -561.61,303.23 -680.86,303.23 -683.14,300.94 -759.21,300.94 -765.75,294.41 -811.59,294.41 ; v1@-155.51,99.45 -71.79,99.45 32.87,-5.22 v1@32.87,-319.72 ; v1(595.33,1272.87) 595.33,1356.02 711.59,1472.28 985.43,1472.28 v1@1030.45,1517.3
  other v1: -921.54,-522.48
"VOLTAGE DIVIDER": R37.1 R38.2 U36.2 U36.6 | length 388.8
  Top Layer w12: U36.2@109.45,-760.24 138.58,-760.24 158.27,-779.92 U36.6@223.62,-779.92 R38.2@383.12,-779.92 ; R37.1@304.57,-847.72 315.33,-847.72 R38.2@383.12,-779.92 ; R38.2@383.39,-779.65 R38.2@383.12,-779.92
pads on no net: "AP7331 voltage regulator.4" "Capteur exte 1." "Capteur exte 2." "Capteur exte 4.6" MicroController1.1 MicroController1.4 MicroController1.6 MicroController1.7 MicroController1.8 MicroController1.9 MicroController1.14 MicroController1.19 MicroController1.27 MicroController1.28 MicroController1.29 MicroController1.36 MicroController1.38 MicroController1.39 MicroController1.47 MicroController1.48 MicroController1.49 MicroController1.50 MicroController1.54 MicroController1.56 MicroController1.65 MicroController1.66 MicroController1.67 MicroController1.68 MicroController1.69 MicroController1.71 MicroController1.72 MicroController1.73 MicroController1.79 MicroController1.89 U31.dout U39.4 U40.5 U40.6 U40.7 U40.12 U40.14 U40.18 U40.19 U40.20 U40.21 U40.22 U40.23 U40.25 U40.26 U41.1 U41.2 U41.4 U41.5 U41.6 U41.7 U41.9 U41.10 U41.11 U41.12 U41.13 U41.14 U41.16 U41.17 U41.18 U41.19 U41.20

## Keep-outs
Keep-Out Layer:
  rectangle: -6379.41,3750.28 4841.06,3947.13
  rectangle: -6379.41,-3926.89 5037.91,-3730.04
  rectangle: -6576.26,-3926.89 -6379.41,3947.13

## Silkscreen, mask and mechanical layers (free items; w line width, h text height)
Top Overlay:
  text "WIFI" at -302.03,2035.1 h157.48
  text "TX ROBOTIC / ISEN" at -930.43,258.21 h118.11
  text "Maxou" at 255.1,-1379.21 h60
Bottom Overlay:
  text "SCSFTLMLF" at 364.47,2054.69 h60
  text "CF" at 240.24,1819.27 h196.85
Mechanical 1:
  lines w10: -2524.32,276.1 cw(c0,0) 2524.32,276.1 ; -2523.81,275.59 -1279.53,275.59 -1279.53,-2185.04 ; -1279.53,-2210.38 -1279.53,-2145.67 ; -1278.94,-2211.09 ccw(c0,0) 1278.44,-2211.38 1279.53,-2210.29 1279.53,-2145.67 1279.53,-2204.72 ; 1279.53,-2185.04 1279.53,275.59 2523.81,275.59

## Text inside footprints (layer, text, board x,y; h text height)
Buzz: Bottom Overlay "+" at -942.22,2232.09 h60 r90
U39: Top Overlay "End of PCB" at -140.79,-2556.73 h19.68